# Altium PCB core-board.PcbDoc
Units mil, origin at the board's own origin, x right, y up, seen from the top; angles counter-clockwise.
Board outline 3375.03 x 1970.03 mil, 2 copper layers (Top Layer, Bottom Layer); 81 components, 71 nets, 298 pads, 191 vias.
Unrouted connection lines stored in the file: 3.
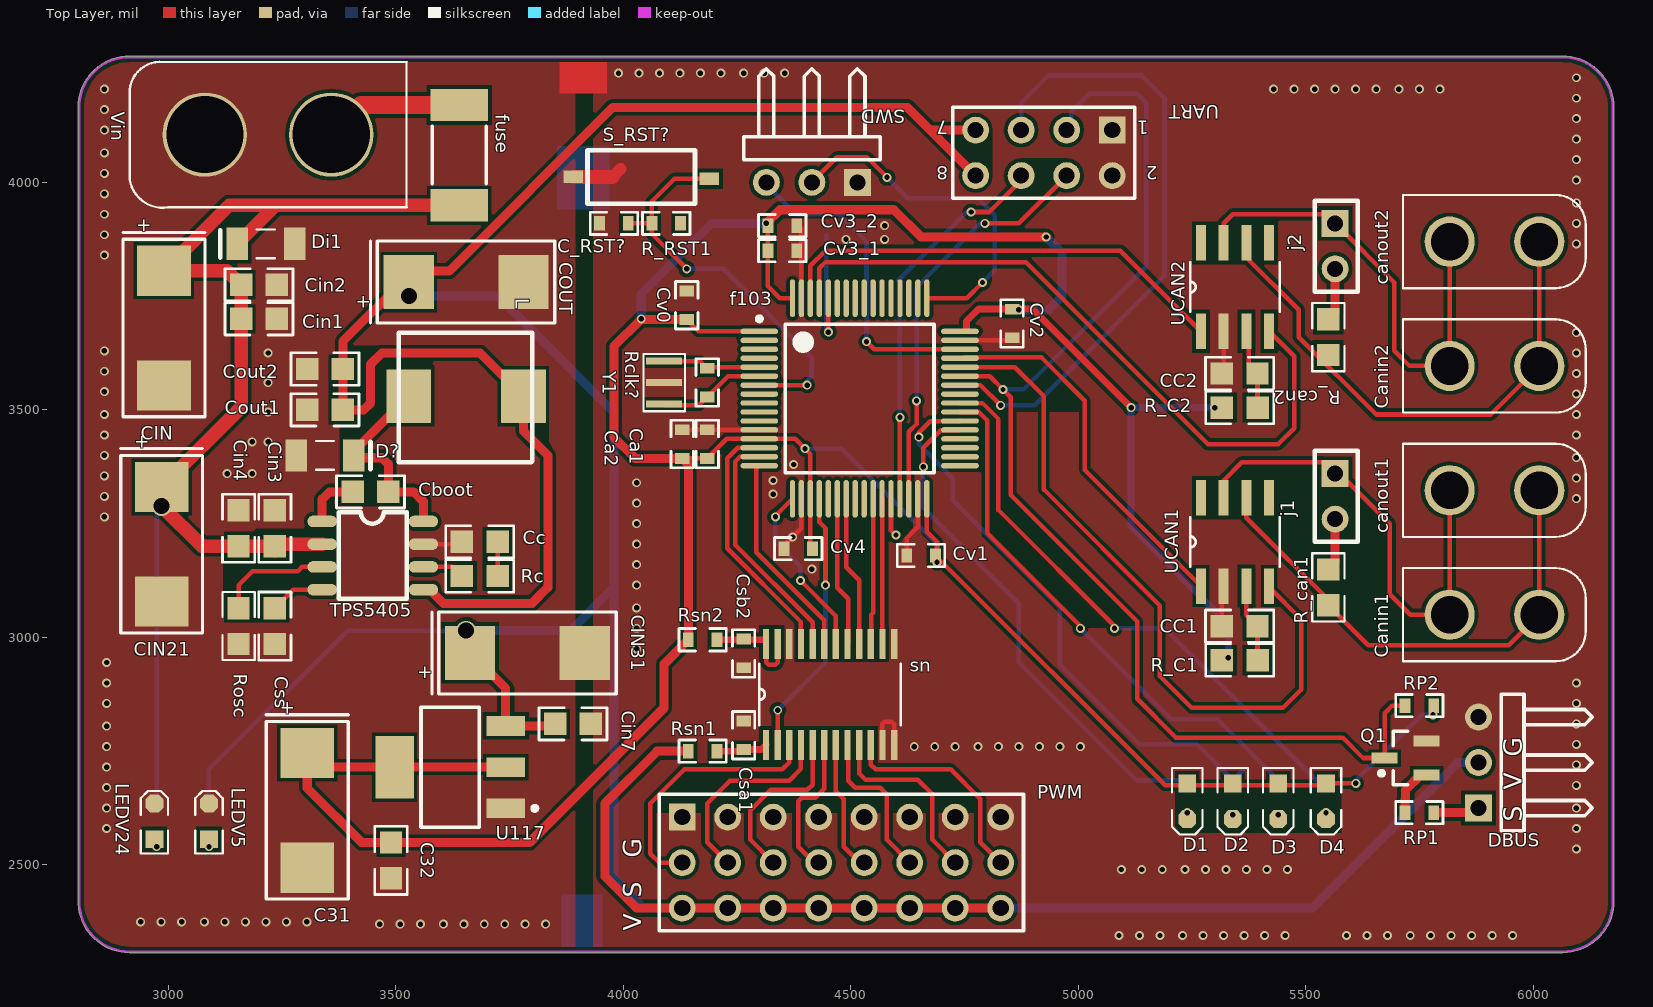
[diagram p0: Top Layer view]
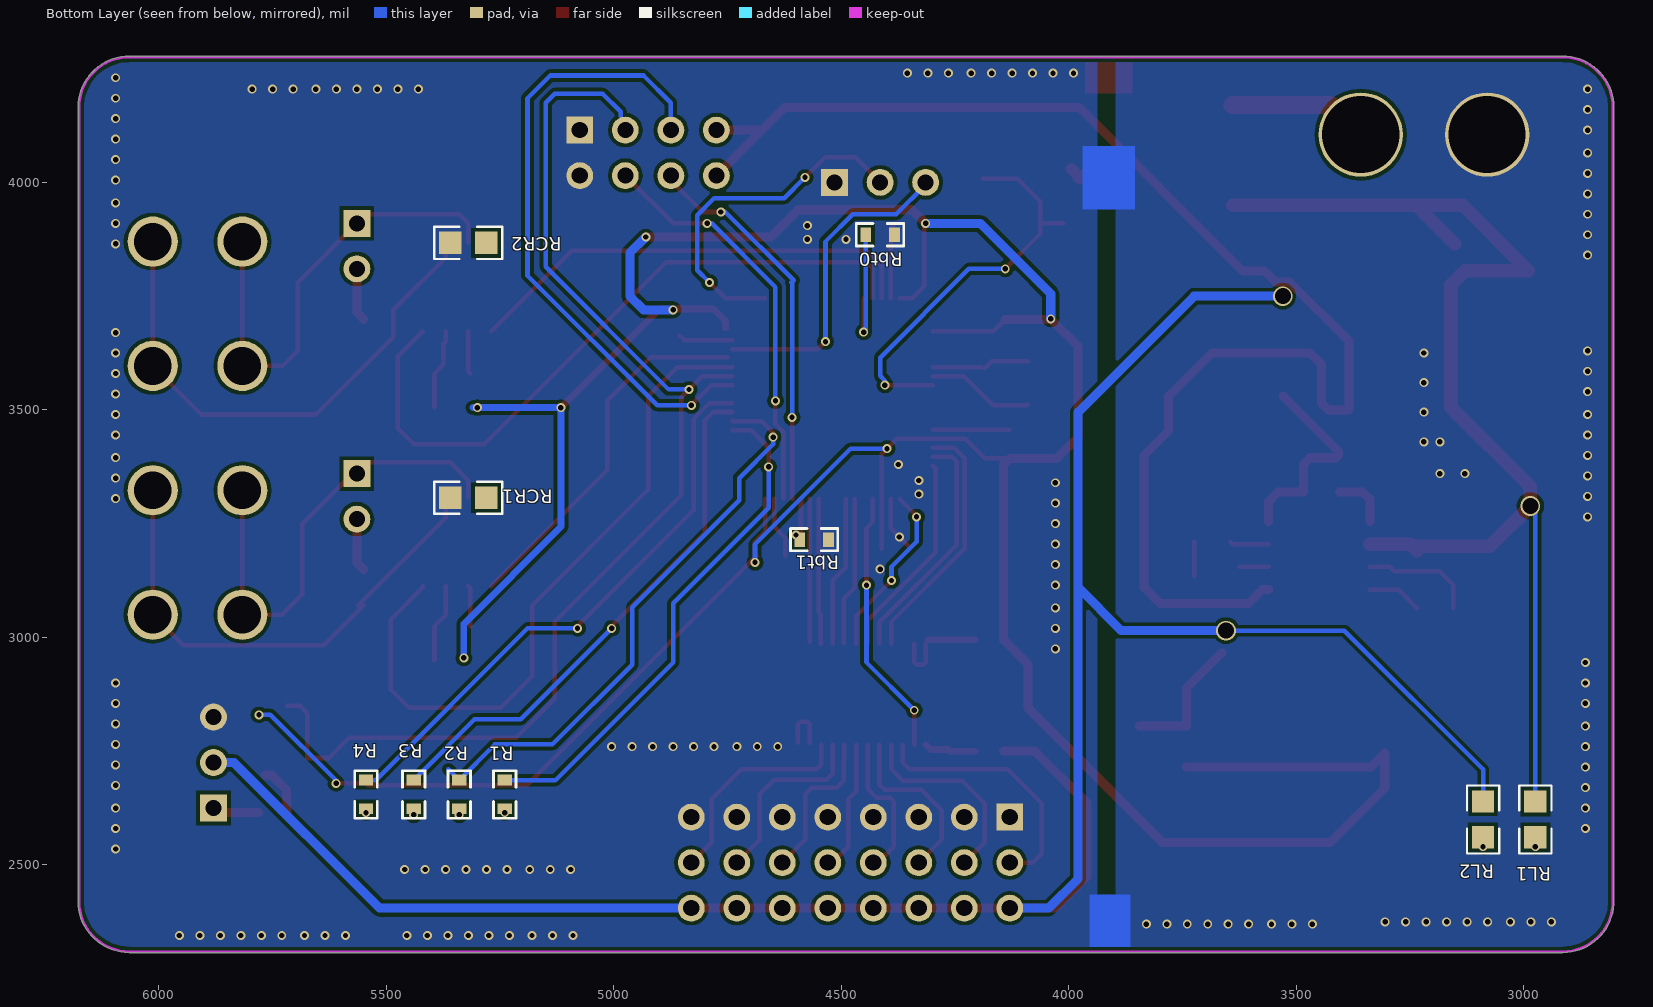
[diagram p1: Bottom Layer view, seen from below]
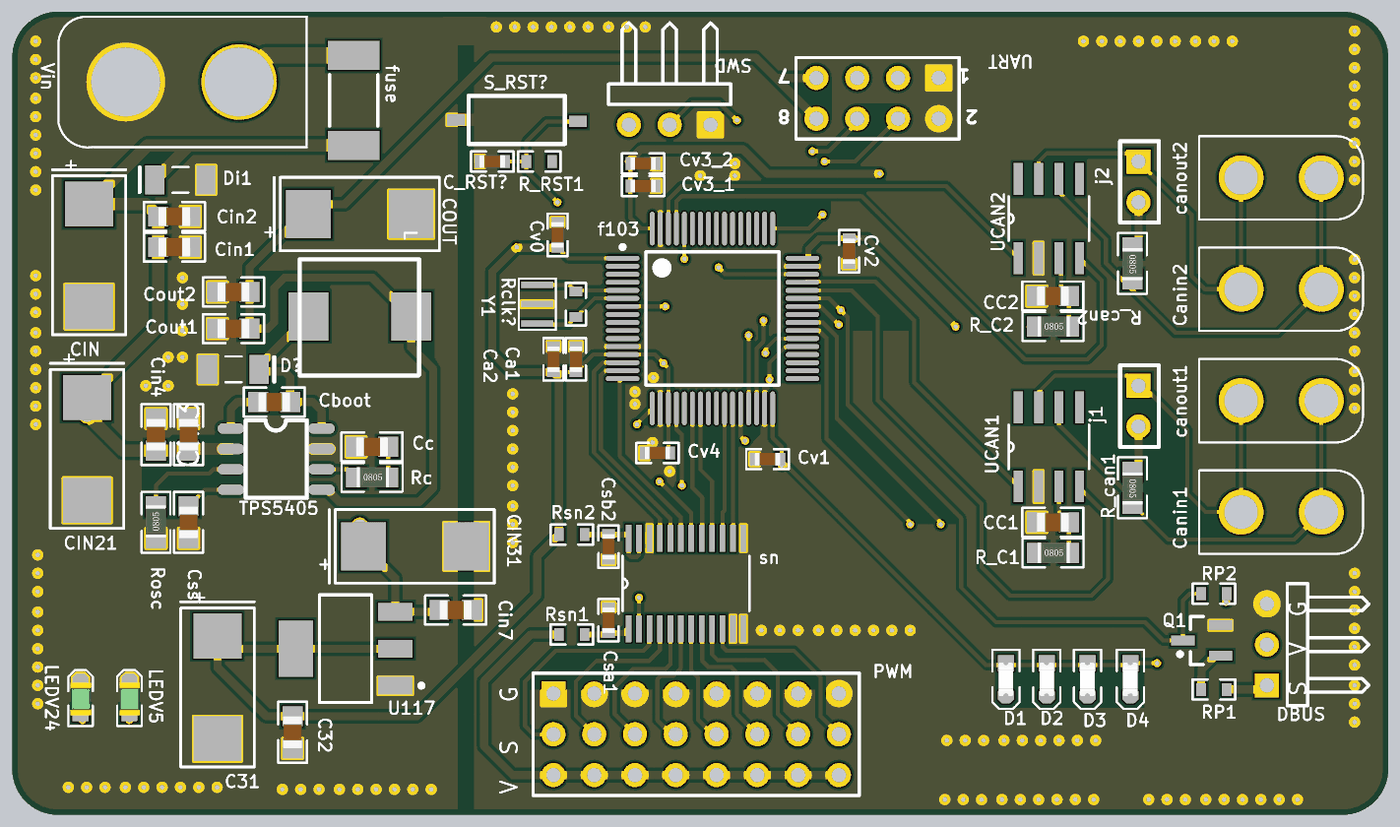
[diagram p2: 3D render of the assembled board from above, using the file's embedded part models]

## Layer stack, top to bottom
Top Solder: solder mask 0.4, Solder Resist, Dk 3.5
Top Layer: signal copper 1.4
Dielectric 1: dielectric 12.6, FR-4, Dk 4.8
Bottom Layer: signal copper 1.4
Bottom Solder: solder mask 0.4, Solder Resist, Dk 3.5

## Board outline
2802.64,2414.14 cw(c2805,2415) 2802.49,2415 2802.49,4165 2802.48,4165 cw(c2915,4165) 2915,4277.52 6065,4277.52 cw(c6065,4165) 6177.52,4165 cw(c6175,4165) 6177.3,4163.98 6177.3,2421.02 cw(c6175,2420) 6177.52,2420 cw(c6065,2420) 6065,2307.49 2915,2307.49 2915,2307.48 ccw(c2915,2310) 2915.02,2307.49 2915,2307.48 cw(c2915,2420)

## Design rules (kind name [scope] priority, off if disabled: settings)
Clearance [All] p1: gap=7 except(8: Arc-Poly Track-Poly SMDPad-Poly THPad-Poly Via-Poly Fill-Poly Poly-Poly)
PlaneConnect [All] p1: planeconnectstyle=Direct reliefexpansion=20 reliefentries=4 reliefconductorwidth=10 reliefairgap=10
PolygonConnect [All] p1: connectstyle=Direct reliefconductorwidth=10 reliefentries=4 polygonreliefangle="90 Angle" airgapwidth=10
RoutingVias [All] p1: holewidth=28 width=50 viastyle="Through Hole" minholewidth=28 minwidth=50 maxholewidth=28 maxwidth=50
SolderMaskExpansion [All] p1: expansion=4
Width [All] p1: maxlimit=50 minlimit=10 preferedwidth=10
29 further rules are at their usual default settings.

## Components (designator, comment, footprint, x,y, rotation, side; value= is the part's Value field where it differs from the comment)
C31 "100u" "CAP _TAN_E_7343" 3305,2625 r270 top
C32 "0.1u" C0805 3490,2510 r270 top
C_RST? "0.1u" C0603 3980,3910 r0 top
Ca1 "1u" C0603 4185,3425 r270 top
Ca2 "0.01u" C0603 4130,3425 r270 top
Canin1 "XT_30-2p" XT_30-2P 5915,3050 r180 top
Canin2 "XT_30-2p" XT_30-2P 5915,3596.67 r180 top
canout1 "XT_30-2p" XT_30-2P 5915,3323.33 r180 top
canout2 "XT_30-2p" XT_30-2P 5915,3870 r180 top
Cboot "0.1u" C0805 3445,3320 r180 top
Cc "2.2n" C0805 3685,3210 r0 top
CC1 "0.1u" C0805 5355,3025 r0 top
CC2 "0.1u" C0805 5355,3580 r0 top
CIN "100u" "CAP _TAN_E_7343" 2990,3685 r270 top
Cin1 "22u" C0805 3200,3700 r180 top
Cin2 "0.1u" C0805 3200,3775 r180 top
Cin3 "10u" C0805 3235,3240 r270 top
Cin4 "0.1u" C0805 3155,3240 r270 top
Cin7 "0.1u" C0805 3890,2810 r0 top
CIN21 "100u" "CAP _TAN_E_7343" 2985,3210 r270 top
CIN31 "100u" "CAP _TAN_E_7343" 3785,2965 r0 top
COUT "100u" "CAP _TAN_E_7343" 3650,3780 r0 top
Cout1 "22u" C0805 3345,3500 r180 top
Cout2 "0.1u" C0805 3345,3590 r180 top
Csa1 "0.1u" C0603 4265,2785 r270 top
Csb2 "0.1u" C0603 4265,2965 r270 top
Css "10n" C0805 3235,3025 r90 top
Cv0 "0.1u" C0603 4140,3730 r270 top
Cv1 "0.1u" C0603 4655,3180 r0 top
Cv2 "0.1u" C0603 4855,3690 r90 top
Cv3_1 "4.7u" C0603 4350,3850 r180 top
Cv3_2 "0.1u" C0603 4350,3905 r180 top
Cv4 "0.1u" C0603 4385,3195 r0 top
D1 "LED_0603" LED_0603 5240,2640 r90 top
D2 "LED_0603" LED_0603 5340,2640 r90 top
D3 "LED_0603" LED_0603 5440,2640 r90 top
D4 "LED_0603" LED_0603 5545,2640 r90 top
D? "Diode" 1206 3345,3400 r0 top
DBUS "KF2510-3P" KF2510-3P 5880,2625 r90 top
Di1 "Diode" 1206 3215,3865 r180 top
f103 "STM32F103RBT6" LQFP64_M 4520,3525 r0 top
fuse "FUSE" 2512 3640,4060 r270 top
j1 "Jumper1" jumper 5565,3310 r90 top
j2 "Jumper2" jumper 5565,3860 r90 top
L "330" inductor330 3655,3530 r0 top
LEDV5 "LED_0805" LED_0805 3090,2595.51 r90 top
LEDV24 "LED_0805" LED_0805 2970,2595.51 r90 top
PWM "Header 3×8" HDR3X8 4130,2605 r0 top
Q1 "PMBT3904" SOT23 5720,2735 r90 top
R1 "3.3k" R0603 5240,2655 r270 bottom
R2 "3.3k" R0603 5340,2655 r270 bottom
R3 "3.3k" R0603 5440,2655 r270 bottom
R4 "3.3k" R0603 5545,2655 r270 bottom
R_C1 "0" R0805 5355.45,2950 r0 top
R_C2 "0" R0805 5355.45,3505 r0 top
R_can1 "120" R0805 5550,3110 r270 top
R_can2 "120" R0805 5550,3660 r270 top
R_RST1 "10k" R0603 4095,3910 r0 top
Rbt0 "10k" R0603 4415,3885 r180 bottom
Rbt1 "10k" R0603 4560,3215 r0 bottom
Rc "47k" R0805 3685,3135 r0 top
Rclk? "1M" R0603 4185,3560 r90 top
RCR1 "10K" R0805 5320,3307 r180 bottom
RCR2 "10K" R0805 5320,3867 r180 bottom
RL1 "10k" R0805 2975,2600 r270 bottom
RL2 "1k" R0805 3090,2600 r270 bottom
Rosc "100k" R0805 3155,3025 r90 top
RP1 "4.7k" R0603 5750,2615 r180 top
RP2 "4.7k" R0603 5750,2850 r0 top
Rsn1 "0" R0603 4175,2750 r0 top
Rsn2 "0" R0603 4175,2995 r0 top
S_RST? "reset" SW 4040,4010 r180 top
sn "SN74LVC4245A_PW_" SN74LVC4245A_PW_ 4455,2875 r90 top
SWD "KF2510-3P" KF2510-3P 4515,4000 r180 top
TPS5405 "TPS5403DR" D0008A_M 3450,3180 r0 top
U117 "SPX1117" SPX1117 3620,2715 r90 top
UART "Header 4X2" HDR2X4 5075,4115 r180 top
UCAN1 "VP230" VP230 5345,3210 r90 top
UCAN2 "VP230" VP230 5345,3770 r90 top
Vin "XT_60-2p" XT_60-2P 3220,4105 r0 top
Y1 "XTAL" SMD-3P 4090,3560 r270 top

## Footprints (in the part's own frame and the unit in brackets; to place one, negate y for a bottom-side part, rotate by r counter-clockwise, add the part's x,y. Pads: shape width x height; smd on the part's side, far side on the other; paste and mask are expansions set on the pad)
1206 [mm]
  rect 1.2x1.8 smd: 1(-1.6,0) 2(1.6,0)
  silkscreen extent -0.51,-0.8 2.54,0.8
2512 [mm]
  rect 1.8x3.2 smd: 1(-2.8,0) 2(2.8,0)
  silkscreen extent -1.6,-1.5 1.6,1.5
C0603 [mm]
  rect 0.6x0.8 smd: 1(-0.8,0) 2(0.8,0)
  silkscreen extent -1.33,-0.63 1.33,0.63, body extent -0.8,-0.4 0.8,0.4, height 0.6
C0805 [mm]
  rect 1.25x1.25 smd: 1(-1,0) 2(1,0)
  silkscreen extent -1.9,-0.9 1.9,0.9, body extent -1,-0.6 1,0.6, height 1.2
"CAP _TAN_E_7343" [mm]
  rect 2.8x3 smd: 1(-3.073,0.025) 2(3.327,0.025)
  silkscreen extent -5.21,-2.26 5.08,2.31
D0008A_M [mm]
  oval 1.65x0.65 smd paste+0 mask+0.051: 1(-2.825,1.905) 2(-2.825,0.635) 3(-2.825,-0.635) 4(-2.825,-1.905) 5(2.825,-1.905) 6(2.825,-0.635) 7(2.825,0.635) 8(2.825,1.905)
  silkscreen extent -1.91,-2.41 1.91,2.41
HDR2X4 [mm] "Connector; Header; 4x2 Position"
  rect 1.5x1.5 hole 0.9: 1(0,0)
  round 1.5 hole 0.9: 2(0,2.54) 3(2.54,0) 4(2.54,2.54) 5(5.08,0) 6(5.08,2.54) 7(7.62,0) 8(7.62,2.54)
  silkscreen extent -1.27,-1.27 8.89,3.81
HDR3X8 [mm] "Connector; Header; 8 Position"
  rect 1.5x1.5 hole 0.9: 1(0,0)
  round 1.5 hole 0.9: 2(2.54,0) 3(5.08,0) 4(7.62,0) 5(10.16,0) 6(12.7,0) 7(15.24,0) 8(17.78,0) 9(0,-2.54) 10(2.54,-2.54) 11(5.08,-2.54) 12(7.62,-2.54) 13(10.16,-2.54) 14(12.7,-2.54) 15(15.24,-2.54) 16(17.78,-2.54) 17(0,-5.08) 18(2.54,-5.08) 19(5.08,-5.08) 20(7.62,-5.08) 21(10.16,-5.08) 22(12.7,-5.08) 23(15.24,-5.08) 24(17.78,-5.08)
  silkscreen extent -1.27,-6.35 19.05,1.27
inductor330 [mm]
  rect 2.5x3 smd: 1(-3.2,0) 2(3.2,0)
  silkscreen extent -3.75,-3.68 3.69,3.56
jumper [mm]
  rect 1.5x1.5 hole 0.9: 1(1.27,0)
  round 1.5 hole 0.9: 2(-1.27,0)
  silkscreen extent -2.54,-1.27 2.54,1.14
KF2510-3P [mm]
  rect 1.5x1.5 hole 0.9: 1(0,0)
  round 1.5 hole 0.9: 2(2.54,0) 3(5.08,0)
  silkscreen extent -1.27,-6.35 6.35,-1.27
LED_0603 [mm]
  rect 1x1 smd: 1(1,0)
  oct 1x1 smd: 2(-1,0)
  silkscreen extent -1.85,-0.85 1.85,0.85, body extent -1.03,-0.45 1.03,0.46, height 0.85
LED_0805 [mm]
  rect 1x1 smd: 1(-0.991,0)
  oct 1x1 smd: 2(1,0)
  silkscreen extent -1.79,-0.76 1.7,0.76, body extent -1.12,-0.65 0.91,0.62, height 1.1
LQFP64_M [mm]
  oval 2.1x0.3 smd: 1(-5.6,3.75) 2(-5.6,3.25) 3(-5.6,2.75) 4(-5.6,2.25) 5(-5.6,1.75) 6(-5.6,1.25) 7(-5.6,0.75) 8(-5.6,0.25) 9(-5.6,-0.25) 10(-5.6,-0.75) 11(-5.6,-1.25) 12(-5.6,-1.75) 13(-5.6,-2.25) 14(-5.6,-2.75) 15(-5.6,-3.25) 16(-5.6,-3.75) 33(5.6,-3.75) 34(5.6,-3.25) 35(5.6,-2.75) 36(5.6,-2.25) 37(5.6,-1.75) 38(5.6,-1.25) 39(5.6,-0.75) 40(5.6,-0.25) 41(5.6,0.25) 42(5.6,0.75) 43(5.6,1.25) 44(5.6,1.75) 45(5.6,2.25) 46(5.6,2.75) 47(5.6,3.25) 48(5.6,3.75)
  oval 0.3x2.1 smd: 17(-3.75,-5.6) 18(-3.25,-5.6) 19(-2.75,-5.6) 20(-2.25,-5.6) 21(-1.75,-5.6) 22(-1.25,-5.6) 23(-0.75,-5.6) 24(-0.25,-5.6) 25(0.25,-5.6) 26(0.75,-5.6) 27(1.25,-5.6) 28(1.75,-5.6) 29(2.25,-5.6) 30(2.75,-5.6) 31(3.25,-5.6) 32(3.75,-5.6) 49(3.75,5.6) 50(3.25,5.6) 51(2.75,5.6) 52(2.25,5.6) 53(1.75,5.6) 54(1.25,5.6) 55(0.75,5.6) 56(0.25,5.6) 57(-0.25,5.6) 58(-0.75,5.6) 59(-1.25,5.6) 60(-1.75,5.6) 61(-2.25,5.6) 62(-2.75,5.6) 63(-3.25,5.6) 64(-3.75,5.6)
  silkscreen extent -5.72,-4.15 4.15,4.57
R0603 [mm]
  rect 0.6x0.8 smd: 1(-0.8,0) 2(0.8,0)
  silkscreen extent -1.33,-0.63 1.33,0.63
R0805 [mm]
  rect 1.25x1.25 smd: 1(-1,0) 2(1,0)
  silkscreen extent -1.9,-0.9 1.9,0.9, body extent -0.95,-0.63 1.05,0.63, height 0.55
SMD-3P [mm]
  rect 0.4x2 smd: 1(-1.2,0) 2(0,0) 3(1.2,0)
  silkscreen extent -1.6,-1.14 1.6,1.17
SN74LVC4245A_PW_ [mil]
  rect 66x14 smd: 1(-111,140.75) 2(-111,115.16) 3(-111,89.57) 4(-111,63.98) 5(-111,38.39) 6(-111,12.8) 7(-111,-12.8) 8(-111,-38.39) 9(-111,-63.98) 10(-111,-89.57) 11(-111,-115.16) 12(-111,-140.75) 13(111,-140.75) 14(111,-115.16) 15(111,-89.57) 16(111,-63.98) 17(111,-38.39) 18(111,-12.8) 19(111,12.8) 20(111,38.39) 21(111,63.98) 22(111,89.57) 23(111,115.16) 24(111,140.75)
  silkscreen extent -67,-156 67,156
SOT23 [mm]
  rect 0.6x1.45 smd: 1(-0.95,-1.175) 2(0.95,-1.175) 3(0,1.175)
  silkscreen extent -1.5,-0.1 1.5,1.47
SPX1117 [mm]
  rect 1.1x2.15 smd: 1(-2.3,-3.1) 2(0,-3.1) 3(2.3,-3.1)
  rect 3.5x2.15 smd: 2(0,3.1)
  silkscreen extent -3.35,-4.85 3.35,1.62
SW [mm]
  rect 1.1x0.7 smd: 1(-3.8,0.05) 2(3.8,-0.05)
  silkscreen extent -3,-1.55 3,1.45
VP230 [mil]
  rect 78x22 smd: 1(-97,75) 2(-97,25) 3(-97,-25) 4(-97,-75) 5(97,-75) 6(97,-25) 7(97,25) 8(97,75)
  silkscreen extent -54,-98 54,98
XT_30-2P [mm] "电池端子小"
  round 2.8 hole 2.1: 1(-2.5,0) 2(2.5,0)
  silkscreen extent -5.1,-2.6 5.1,2.6
XT_60-2P [mm] "电池端子大"
  round 4.7 hole 4.3: 1(-3.535,0) 2(3.525,0)
  silkscreen extent -7.73,-4.08 7.75,4.07

## Part data
C31 CIN CIN21 CIN31 COUT: library part "CAP _TAN_E_7343"
C32 Cboot Cc CC1 CC2 Cin1 Cin2 Cin3 Cin4 Cin7 Cout1 Cout2 Css: library part CAP_0805
C_RST? Ca1 Ca2 Csa1 Csb2 Cv0 Cv1 Cv2 Cv3_1 Cv3_2 Cv4: library part CAP_0603
fuse: library part Fuse
j1 j2: library part Jumper
L: library part LQH3NPN100
Q1: "NPN Switching Transistor"
R1 R2 R3 R4 R_RST1 Rbt0 Rbt1 Rclk? RP1 RP2 Rsn1 Rsn2: library part RES_0603
R_C1 R_C2 R_can1 R_can2 Rc RCR1 RCR2 RL1 RL2 Rosc: library part RES_0805
S_RST?: library part SW-PB, "Switch"
TPS5405: "Imported"
UART: "Header, 4-Pin, Dual row"
Y1: library part XTAL_C_MINI

## Via types
v1: diameter 19.68, hole 11.81, Top Layer to Bottom Layer, 188 vias
v2: diameter 43.31, hole 35.43, Top Layer to Bottom Layer, 3 vias

## Nets (pads, with @x,y where several pads share a name; then routed paths per layer and width w, separated by ;. In a path a pad name is that pad's centre, name@x,y a point inside that pad or via, vN(x,y) a via of type N, cw(c..) or ccw(c..) an arc to the next point about the centre after c; other vN are vias at no path point)
CAN_H1: Canin1.2 canout1.2 j1.1 UCAN1.7 | length 1095.9
  Top Layer w10: UCAN1.7 5320,3345 5360,3385 5540,3385 j1.1 ; j1.1@5575,3360 5685,3250 5685,3240 5685,3095 5730,3050 Canin1.2 5816.57,3108.43 canout1.2 canout1.2@5779.91,3360
CAN_H2: Canin2.2 canout2.2 j2.1 UCAN2.7 | length 1047.1
  Top Layer w10: UCAN2.7 5320,3910 5340,3930 5545,3930 j2.1 5695,3780 5695,3630 5728.33,3596.67 Canin2.2 canout2.2
CAN_L1: Canin1.1 canout1.1 R_can1.2 UCAN1.6 | length 1135.5
  Top Layer w10: UCAN1.6 5370,3263.19 R_can1.2@5562.56,3070.63 ; R_can1.2 5637.75,2982.88 5946.31,2982.88 Canin1.1 canout1.1 canout1.1@5994.99,3323.33
CAN_L2: Canin2.1 canout2.1 R_can2.2 UCAN2.6 | length 1171
  Top Layer w10: UCAN2.6 5370,3835 5485,3720 5485,3660 5655,3490 5906.76,3490 Canin2.1 canout2.1
CAN_RX1: f103.44 UCAN1.4 | length 1544.2
  Top Layer w10: f103.44 4861.1,3593.9 4925,3530 4925,3325 5180,3070 5180,2915 5250,2845 5450,2845 5490,2885 5490,3040 5420,3110 UCAN1.4
CAN_RX2: f103.61 UCAN2.4 | length 1531.1
  Top Layer w10: f103.61 4431.42,3811.42 4445,3825 4885,3825 5285,3425 5440,3425 5475,3460 5475,3618 UCAN2.4
CAN_TX1: f103.45 UCAN1.1 | length 817.1
  Top Layer w10: f103.45@4750,3615.36 4919.64,3615.36 5015,3520 5015,3368 UCAN1.1
CAN_TX2: f103.62 UCAN2.1 | length 1016.6
  Top Layer w10: f103.62 4411.73,3816.73 4445,3850 5093,3850 UCAN2.1
DIR: f103.20 sn.2 | length 589.7
  Top Layer w10: sn.2 4339.84,2839.84 v1(4340,2840) ; f103.20 4431.42,3253.67 4445,3240.09 v1(4445,3115)
  Bottom Layer w10: v1(4340,2840) 4445,2945 v1(4445,3115)
GND: C31.2 C32.2 C_RST?.1 Ca1.1 Ca2.1 CC1.1 CC2.1 Cc.1 Cin1.1 Cin2.1 Cin3.1 Cin4.1 Cin7.2 CIN21.2 CIN31.2 CIN.2 Cout1.2 Cout2.2 COUT.2 Csa1.1 Csb2.2 Css.1 Cv0.1 Cv1.1 Cv2.1 Cv3_1.1 Cv3_2.1 Cv4.1 D?.1 DBUS.3 Di1.1 f103.12 f103.18 f103.31 f103.47 f103.63 LEDV5.2 LEDV24.2 PWM.1 PWM.2 PWM.3 PWM.4 PWM.5 PWM.6 PWM.7 PWM.8 Q1.2 Rbt0.2 Rbt1.1 RCR1.1 RCR2.1 Rosc.1 S_RST?.2 sn.11 sn.12 sn.13 sn.22 SWD.1 TPS5405.7 U117.1 UART.1 UART.2 UCAN1.2 UCAN2.2 Vin.1 Y1.2 | length 1205.9
  Top Layer w10: TPS5405.7 3640.63,3205 Cc.1 ; Ca2.1 4130.39,3456.1 f103.12 ; Cv4.1@4353.5,3201.46 4392.05,3240 f103.18 ; Cv3_2.1@4381.5,3910 4392.05,3899.45 f103.63 ; sn.11@4570.16,2769 4570,2769.16 4570,2810 4575,2815 4590,2815 4595.75,2809.25 sn.12@4595.75,2769 ; Cv1.1 4623.5,3218.5 4647.95,3242.95 f103.31 ; f103.47 4844.45,3652.95 Cv2.1@4855,3663.5 ; CC1.1 5315.63,3108.63 UCAN1.2 ; CC2.1 5320,3584.37 UCAN2.2
  Top Layer w25: 3976.97,4011.97 3995,4030
  Top Layer w30: S_RST?.2 3976.97,4011.97
  other v1: 5090,2345 5135,2345 5180,2345 5230,2345 5275,2345 5320,2345 5365,2345 5410,2345 5455,2345 5590,2345 5635,2345 5680,2345 5730,2345 5775,2345 5820,2345 5865,2345 5910,2345 5955,2345 3465,2370 3510,2370 3555,2370 3605,2370 3650,2370 3695,2370 3740,2370 3785,2370 3830,2370 2940,2375 2985,2375 3030,2375 3080,2375 3125,2375 3170,2375 3215,2375 3260,2375 3305,2375 5095,2490 5140,2490 5185,2490 5235,2490 5280,2490 5325,2490 5370,2490 5415,2490 5460,2490 6095,2535 2865,2580 6095,2580 2865,2625 6095,2625 2865,2670 6095,2675 2865,2715 6095,2720 2865,2760 4640,2760 4685,2760 4730,2760 4780,2760 4825,2760 4870,2760 4915,2760 4960,2760 5005,2760 6095,2765 2865,2805 6095,2810 2865,2855 6095,2855 2865,2900 6095,2900 2865,2945 4030,2975 4030,3020 4030,3065 4030,3115 4415,3150 4030,3160 4030,3205 4372.78,3220.73 4030,3250 2860,3265 4030,3295 6095,3305 2860,3310 4330,3315 4030,3340 4330,3345 6095,3350 2860,3355 3130,3360 3185,3360 4375,3380 6095,3395 2860,3400 3185,3430 3220,3430 2860,3445 6095,3445 2860,3490 6095,3490 3220,3495 6095,3535 2860,3540 3220,3560 6095,3580 2860,3585 3220,3625 6095,3625 2860,3630 6095,3670 2860,3840 6095,3865 4490,3875 4575,3875 2860,3885 4575,3905 6095,3910 2860,3930 6095,3955 2860,3975 6095,4005 2860,4020 6095,4050 2860,4065 6095,4095 2860,4115 6095,4140 2860,4160 6095,4185 2860,4205 5430,4205 5475,4205 5520,4205 5565,4205 5610,4205 5655,4205 5705,4205 5750,4205 5795,4205 6095,4230 3990,4240 4035,4240 4080,4240 4125,4240 4170,4240 4215,4240 4265,4240 4310,4240 4355,4240
KEY_1: f103.51
KEY_2: f103.52
KEY_3: f103.53
KEY_4: f103.54
LED_1: f103.37 R1.1 | length 1132.6
  Top Layer w10: v1(4660,3375) 4660,3416.7 4698.3,3455 4739.37,3455 f103.37
  Bottom Layer w10: v1(4660,3375) 4660,3285 4870,3075 4870,2945 5128.5,2686.5 R1.1
LED_2: f103.38 R2.1 | length 1258.2
  Top Layer w10: v1(4650,3440) 4650,3450 4675,3475 4739.69,3475 f103.38
  Bottom Layer w10: v1(4650,3440) 4650,3425 4725,3350 4725,3301.5 4960,3066.5 4960,2940 5135,2765 5261.5,2765 R2.1 5363.81,2710.31
LED_3: f103.39 R3.1 | length 1180.8
  Top Layer w10: f103.39 4781.54,3495.47 4800,3477.02 4800,3230 v1@5007.5,3022.5
  Bottom Layer w10: v1(5005,3020) 5205,2820 5306.5,2820 R3.1
LED_4: f103.40 R4.1 | length 1266.4
  Top Layer w10: f103.40 4789.84,3515.16 4825,3480 4825,3280 v1@5082.5,3022.5
  Bottom Layer w10: v1(5080,3020) 5190,3020 5523.5,2686.5 R4.1
NetC_RST?_2: C_RST?.2 f103.7 R_RST1.1 S_RST?.1 | length 904.4
  Top Layer w10: C_RST?.2 R_RST1.1 ; v1(4140,3810) 4063.5,3886.5 R_RST1.1 ; S_RST?.1 4113.03,4008.03 4063.5,3958.5 R_RST1.1 ; f103.7 v1(4404.53,3554.53)
  Bottom Layer w10: v1(4140,3810) 4220,3810 4415,3615 4415,3575 4404.53,3564.53 v1(4404.53,3554.53)
NetCboot_1: Cboot.1 D?.2 L.1 TPS5405.8 | length 454.6
  Top Layer w20: L.1 3407.99,3408.98 D?.2 3412.99,3395 3470,3395 3484.37,3380.63 Cboot.1 3540,3320 3561.22,3298.78 TPS5405.8
NetCboot_2: Cboot.2 TPS5405.1 | length 122.3
  Top Layer w20: TPS5405.1 3338.78,3303.78 3355,3320 Cboot.2
NetCC1_2: CC1.2 R_C1.2 UCAN1.3 | length 173.3
  Top Layer w10: UCAN1.3 5370,3049.37 CC1.2 5394.37,2950.45 R_C1.2
NetCC2_2: CC2.2 R_C2.2 UCAN2.3 | length 177.6
  Top Layer w10: UCAN2.3 5370,3650 5375,3645 5375,3599.37 CC2.2 R_C2.2@5394.37,3505.45
NetCc_2: Cc.2 Rc.2 | length 75
  Top Layer w10: Rc.2 Cc.2
NetCsa1_2: Csa1.2 Rsn1.2 sn.1 | length 113.6
  Top Layer w15: Rsn1.2 4261.5,2750 Csa1.2 4303.76,2753.5 sn.1
NetCsb2_1: Csb2.1 Rsn2.2 sn.23 sn.24 | length 215
  Top Layer w10: sn.24 4314.25,2945.75 4320,2940 4335,2940 4340,2945 4340,2985.84 sn.23
  Top Layer w15: Rsn2.2 sn.24@4310,2995
NetCss_2: Css.2 TPS5405.4 | length 120.6
  Top Layer w10: Css.2 3275.63,3105 TPS5405.4
NetD1_2: D1.2 R1.2
  other v1: 5240,2615
NetD2_2: D2.2 R2.2
  other v1: 5340,2610
NetD3_2: D3.2 R3.2
  other v1: 5440,2610
NetD4_2: D4.2 R4.2
  other v1: 5545,2615
NetDBUS_1: DBUS.1 RP1.1 | length 102.6
  Top Layer w20: RP1.1 5870,2615 DBUS.1
Netf103_5: f103.5 Rclk?.2 Y1.1 | length 208.6
  Top Layer w10: Y1.1 4169.25,3607.24 Rclk?.2 ; Rclk?.2@4192.4,3593.9 f103.5
Netf103_6: f103.6 Rclk?.1 Y1.3 | length 237.3
  Top Layer w10: Y1.3 4092.76,3510 4166.5,3510 Rclk?.1 4230.71,3574.21 f103.6
Netf103_28: f103.28 Rbt1.2 | length 84.8
  Top Layer w10: f103.28 4588.9,3235 4598.9,3225 v1(4600,3225)
Netf103_60: f103.60 Rbt0.1 | length 290.2
  Top Layer w10: v1(4451.1,3671.1) f103.60
  Bottom Layer w10: Rbt0.1 4446.5,3675.71 v1(4451.1,3671.1)
Netfuse_1: fuse.1 Vin.2 | length 308.2
  Top Layer w40: Vin.2 3424.02,4170.24 fuse.1
Netj1_2: j1.2 R_can1.1 | length 116.8
  Top Layer w20: R_can1.1 5565,3164.37 j1.2
Netj2_2: j2.2 R_can2.1 | length 116.8
  Top Layer w20: R_can2.1 5565,3714.37 j2.2
NetLEDV5_1: LEDV5.1 RL2.2
  other v1: 3090,2540
NetLEDV24_1: LEDV24.1 RL1.2
  other v1: 2975,2540
NetQ1_1: Q1.1 RP1.2 | length 110.4
  Top Layer w20: RP1.2 5718.5,2643.5 5720,2645 5720,2665 5752.6,2697.6 Q1.1
NetRc_1: Rc.1 TPS5405.6 | length 64.4
  Top Layer w10: TPS5405.6 Rc.1@3625.63,3155
NetRCR1_2: RCR1.2 UCAN1.8
NetRCR2_2: RCR2.2 UCAN2.8
NetRosc_2: Rosc.2 TPS5405.3 | length 251
  Top Layer w10: Rosc.2 3155,3115 3185,3145 3285,3145 3295,3155 TPS5405.3
PO1: PWM.9 sn.3 | length 569.7
  Top Layer w10: PWM.9 4080,2505 4060,2525 4060,2635 4135,2710 4349.84,2710 4365,2725.16 4365,2763.57 sn.3
PO2: PWM.10 sn.4 | length 439.1
  Top Layer w10: PWM.10 4185,2550 4185,2635 4235,2685 4365,2685 4391.02,2711.02 sn.4
PO3: PWM.11 sn.5 | length 383.2
  Top Layer w10: PWM.11 4280,2555 4280,2620 4325,2665 4405,2665 4416.61,2676.61 sn.5
PO4: PWM.12 sn.6 | length 324.8
  Top Layer w10: PWM.12 4420,2505 4385,2540 4385,2640 4393,2648 4423,2648 4442.2,2667.2 sn.6
PO5: PWM.13 sn.7 | length 290.6
  Top Layer w10: sn.7 4467.8,2662.2 4485,2645 4485,2540 4520,2505 PWM.13
PO6: PWM.14 sn.8 | length 347.8
  Top Layer w10: sn.8 4493.39,2731.61 4495,2730 4495,2685 4510,2670 4565,2670 4580,2655 4580,2555 PWM.14
PO7: PWM.15 sn.9 | length 414.2
  Top Layer w10: sn.9 4518.98,2701.02 4533,2687 4647,2687 4647.5,2687.5 4680,2655 4680,2555 PWM.15
PO8: PWM.16 sn.10 | length 473.9
  Top Layer w10: sn.10 4544.57,2720.43 4555,2710 4720,2710 4785,2645 4785,2550 PWM.16
"PWM 1": f103.14 sn.21 | length 554.9
  Top Layer w10: f103.14 4251.73,3416.73 4229.19,3394.19 4229.19,3195.81 4391.02,3033.98 sn.21
"PWM 2": f103.15 sn.20 | length 529.2
  Top Layer w10: f103.15 4257.05,3397.05 4246.19,3386.19 4246.19,3203.81 4416.61,3033.39 sn.20 sn.20@4417.2,2986
"PWM 3": f103.16 sn.19 | length 455.9
  Top Layer w10: f103.16 4293,3370.83 4293,3187 4442.2,3037.8 sn.19
"PWM 4": f103.17 sn.18 | length 388.4
  Top Layer w10: v1@4333.92,3266.08 f103.17 ; v1(4390,3125) 4467.8,3047.2 sn.18
  Bottom Layer w10: v1(4335,3265) 4335,3210 4390,3155 v1(4390,3125)
"PWM 5": f103.22 sn.17 | length 326.9
  Top Layer w10: f103.22 4470.79,3109.21 4495,3085 sn.17@4495,2987.61
"PWM 6": f103.23 sn.16 | length 330.3
  Top Layer w10: f103.23 4490.47,3154.53 4518.98,3126.02 sn.16
"PWM 7": f103.26 sn.15 | length 321.3
  Top Layer w10: sn.15@4544.06,2986.51 sn.15 4545,2986.43 4545,3050 4549.53,3054.53 f103.26
"PWM 8": f103.27 sn.14 | length 313.9
  Top Layer w10: f103.27 4570.16,3303.58 sn.14@4570.16,2991
RXD1: f103.43 Q1.3 RP2.1 UART.3 | length 2643.3
  Top Layer w10: f103.43 4805.79,3574.21 v1(4835,3545) 4851.84,3528.16 4851.84,3313.16 5130,3035 5130,2865 5215,2780 5581.31,2780 5626.31,2735 Q1.3 5673.74,2833.74 5690,2850 RP2.1
  Bottom Layer w10: v1(4835,3545) 4880,3545 5150,3815 5150,4175 5130,4195 5025,4195 4985,4155 4985,4145
RXD3: f103.30 UART.4 | length 904
  Top Layer w10: f103.30 4628.16,3304.64 4628.16,3452.2 4645,3469.04 v1(4645,3520) ; v1(4795,3910) 4870,3910 UART.4
  Bottom Layer w10: v1(4645,3520) 4645,3770 4785,3910 v1(4795,3910)
SWCLK: f103.49 SWD.2 | length 778.1
  Top Layer w10: SWD.2 4470,4055 4536.03,4055 v1(4580,4011.03) ; f103.49 4755.47,3745.47 v1(4790,3780)
  Bottom Layer w10: v1(4580,4011.03) 4626.03,3965 4780,3965 4816.84,3928.16 4816.84,3806.84 v1(4790,3780) v1@4785,3780
SWDIO: f103.46 SWD.3 | length 709.2
  Top Layer w10: v1(4535,3650) 4551.73,3633.27 f103.46
  Bottom Layer w10: SWD.3 4315,3995 4380,3930 4475,3930 4535,3870 v1(4535,3650)
TXD1: f103.42 UART.5 | length 1396.6
  Top Layer w10: f103.42 4785.47,3554.53 v1(4830,3510)
  Bottom Layer w10: v1(4830,3510) 4905,3510 5190,3795 5190,4185 5140,4235 4935,4235 4875,4175 UART.5
TXD3: f103.29 UART.6 | length 858.4
  Top Layer w10: f103.29 v1(4608.58,3483.58) ; v1(4765,3935) 4805,3935 4875,4005 UART.6
  Bottom Layer w10: v1@4610,3480 4608.58,3481.42 v1(4608.58,3483.58) 4608.58,3778.58 4610,3780 4605,3785 4755,3935 v1(4765,3935)
V_3.3: C31.1 C32.1 Ca1.2 Ca2.2 Cv0.2 Cv1.2 Cv2.2 Cv3_1.2 Cv3_2.2 Cv4.2 D1.1 D2.1 D3.1 D4.1 f103.1 f103.13 f103.19 f103.32 f103.48 f103.64 R_C1.1 R_C2.1 R_RST1.2 RP2.2 Rsn2.1 U117.2 | length 8044.1
  Top Layer w10: Ca2.2 Ca1.2 4227.91,3436.42 f103.13 4378.58,3436.42 v1(4400,3415) 4411.73,3403.27 f103.19 Cv4.2@4411.73,3194.76 ; Cv0.2 4165.87,3672.64 f103.1 ; Cv3_2.2@4318.5,3910 4318.5,3771.5 4344.53,3745.47 f103.64 ; f103.32 4667.64,3232.36 4690,3210 4690,3183.5 Cv1.2 5191.5,2675 5540.63,2675 D4.1 v1(5610.63,2679.37) ; Cv2.2@4850,3721.5 Cv2.2@4855,3726.5
  Top Layer w15: 4755,3680 4755,3695 4781.5,3721.5 4850,3721.5 Cv2.2 4900,3721.5 v1(5116.5,3505)
  Top Layer w20: U117.2@3742.05,2715 3497.95,2715 3336.98,2715 C31.1 3306,2669 3425.63,2549.37 C32.1 3794.37,2549.37 4090,2845 4090,2941.5 Rsn2.1 4143.5,3380 Ca2.2 4026.5,3393.5 3980,3440 3980,3640 4038.5,3698.5 Cv0.2 ; v1(4315,3910) 4345,3940 4595,3940 4655,3880 v1(4930,3880)
  Bottom Layer w10: v1(4400,3415) 4480,3415 4690,3205 v1(4690,3165) ; v1(5610.63,2679.37) 5610.63,2685.63 5755,2830 v1(5780,2830)
  Bottom Layer w15: 5310,3505 v1(5300,3505) v1(5116.5,3505) 5116.5,3243.5 5330,3030 v1(5330,2955)
  Bottom Layer w20: v1(4040,3700) 4040,3755 4195,3910 v1(4315,3910) ; v1(4870,3720) 4935,3720 4965,3750 4965,3845 v1(4930,3880)
VCC_5: Cin7.1 CIN31.1 Cout1.1 Cout2.1 COUT.1 DBUS.2 L.2 PWM.17 PWM.18 PWM.19 PWM.20 PWM.21 PWM.22 PWM.23 PWM.24 RL2.1 Rsn1.1 TPS5405.5 U117.3 UART.7 UART.8 | length 8850.5
  Top Layer w20: TPS5405.5 3575,3105 3605,3075 3800,3075 3835,3110 3835,3400 3780.98,3454.02 L.2 3685.98,3625 3470,3625 3445,3600 3445,3515 3430,3500 Cout1.1 Cout2.1 3384.37,3650.63 3514.74,3781 COUT.1 3546,3781 3570,3805 3617.7,3805 3977.7,4165 4625,4165 4675,4115 ; CIN31.1 3742.05,2887.97 U117.3 Cin7.1@3846.18,2805.55 ; Rsn1.1 4075,2750 3960,2635 3960,2475 4030,2405 PWM.17 PWM.18 PWM.19 PWM.20 PWM.21 PWM.22 PWM.23 PWM.24 ; UART.8 4675,4115 ; UART.7 4675,4115
  Bottom Layer w10: RL2.1 3090,2710 3395,3015 v2(3655,3015)
  Bottom Layer w20: v2(3530,3750) 3725,3750 3980,3495 3980,3110 ; v2(3655,3015) 3885,3015 3980,3110 ; PWM.17 4045,2405 3980,2470 3980,3110 ; PWM.24 5515,2405 5835,2725 DBUS.2
VCC_24V: Cin1.2 Cin2.2 Cin3.2 Cin4.2 CIN21.1 CIN.1 Di1.2 fuse.2 RL1.1 TPS5405.2 | length 2618.7
  Top Layer w30: Di1.2 3236.77,3949.76 ; Cin3.2@3235,3190.63 3249.37,3205 TPS5405.2 ; Cin3.2 Cin4.2 3074.37,3200.63 v2(2986,3289) CIN21.1 3160.63,3505.61 Cin1.2 Cin2.2 3129.65,3805.98 CIN.1 3134.78,3949.76 3236.77,3949.76 ; fuse.2 3236.77,3949.76
  Bottom Layer w10: RL1.1 2975,3278 v2(2986,3289)
pads on no net: f103.2 f103.3 f103.4 f103.8 f103.9 f103.10 f103.11 f103.21 f103.24 f103.25 f103.33 f103.34 f103.35 f103.36 f103.41 f103.50 f103.55 f103.56 f103.57 f103.58 f103.59 UCAN1.5 UCAN2.5

## Polygon pours and split planes (outlines as drawn)
GND on Top Layer "Top Layer-No Net" (solid, remove dead copper, pour order 2): 2805,4185 2810,4205 2840,4245 2860,4265 2870,4265 2900,4275 2915,4275 6065,4275 6100,4270 6115,4260 6125,4260 6145,4240 6160,4225 6165,4210 6170,4190 6174.79,4165 6174.79,2410.21 6170,2390 6170,2380 6160,2370 6160,2360 6120,2320 6115,2320 6100,2320 6065,2310 2890,2310 2880,2315 2870,2320 2840,2340 2820,2365 2810,2390 2805,2400 2805,2425
GND on Bottom Layer "Top Layer-No Net" (solid, remove dead copper, pour order 6): 2915,2310 2890,2310 2885,2315 2870,2315 2860,2325 2855,2325 2845,2335 2825,2355 2815,2365 2815,2380 2805,2390 2805,2405 2805,4175 2810,4195 2820,4215 2820,4225 2840,4245 2855,4260 2860,4260 2865,4260 2870,4265 2885,4270 2915,4275 6080,4275 6095,4275 6105,4270 6120,4265 6140,4245 6160,4225 6165.8,4215 6170,4195 6175,4185 6175,4170 6175,2410 6170,2385 6160,2365 6160,2360 6135,2335 6125,2325 6120,2325 6105,2315 6085,2310 6065,2310

## Keep-outs
Keep-Out Layer:
  lines w5: 2805,2415 2805,4165 cw(c2915,4165) 2915,4275 6065,4275 cw(c6065,4165) 6175,4165 ; 2805,2420 ccw(c2915,2420) 2915,2310 6065,2310 ccw(c6065,2420) 6175,2420 ; 6174.79,2420 6174.79,4165

## Other copper
Top Layer:
  rectangle net GND: 3860,4195 3965,4265
  pour cut-out: 3935,2315 3935,4275 3920,4275 3895,4275 3895,2320 3910,2320
  pour cut-out: 4065,2615 4785,2615 4785,2626.26 4756.26,2655 4085,2655
  pour cut-out: 5212.31,2661.75 5212.31,2582.68 5225,2570 5580,2570 5580,2658.8 5572.69,2666.12
  pour cut-out: 4987.55,3023.71 4991.26,3020 5125,3020 5125,3040 5105,3060 4975,3060
  pour cut-out: 4860,3495 5025.39,3495 5024.37,3496.02 5024.37,3529.37 4829.37,3529.37 4825,3525
  pour cut-out: 3373.02,3287.39 3378.05,3282.36 3378.05,3096.89 3341.89,3096.89 3365,3120 3365,3320 3355,3320 3346.89,3311.89
  pour cut-out: 3122.39,3096.98 3120,3099.37 3120,3185 3150,3185 3160,3175 3160,3080
  pour cut-out: 3187.61,3031.76 3202.39,3031.76 3210,3039.37 3210,3045 3185,3045
  pour cut-out: 3187.61,3233.24 3194.37,3240 3310,3240 3310,3264.09 3350,3224.09 3350,3220 3275,3220 3245,3190 3234.37,3200.63 3175,3200.63
  pour cut-out: 3376.37,3443.43 3376.37,3466.37 3380,3470 3395,3455 3405,3455
  pour cut-out: 3351.76,3557.39 3351.76,3533.24 3355,3530 3375,3550 3435,3550 3435,3565 3430,3570
  pour cut-out: 3462.98,3641.96 3393.04,3641.96 3402.72,3632.28 3402.72,3622.61 3467.61,3622.61 3470,3625
  pour cut-out: 3586.23,3597.06 3580,3603.28 3580,3610 3565,3610 3560,3605 3560,3590
  pour cut-out: 5289,3354 5301,3354 5301,3260 5270,3260
  pour cut-out: 5339,3260 5351,3260 5350,3261 5350,3275 5330,3275
  pour cut-out: 5289,3914 5301,3914 5301,3820 5289,3820
  pour cut-out: 5339,3820 5351,3820 5350,3821 5350,3840 5340,3840 5335,3845
  pour cut-out: 4808.19,3780 4810,3781.81 4810,3820 4790,3820 4790,3780
  pour cut-out: 4812.85,4015 4812.85,4115 4795,4115 4795,4045 4780,4030
  pour cut-out: 4875,4052.85 4975,4052.85 4975,4040 4960,4025 4885,4025
  pour cut-out: 3691.76,3177.39 3691.76,3167.61 3721.98,3167.61 3724.37,3170 3720,3174.37 3720,3180
  pour cut-out: 3526.54,3269.99 3526.54,3277.83 3516.98,3287.39 3516.98,3301.65 3518.62,3300 3545,3300 3545,3284.5 3542.87,3282.36
  pour cut-out: 3451.76,3287.39 3438.24,3287.39 3438.24,3298.24 3440,3300 3455,3300
  pour cut-out: 3838.2,3462.94 3838.2,3429.83 3847.98,3412.98 3853.35,3400 3845,3391.65 3830,3410 3805.08,3462.94
  pour cut-out: 4617.79,3222.99 4616.47,3232.3 4617.57,3255.2 4638.29,3255.2 4638.29,3261.22 4618.55,3259.07 4607.15,3255.2 4606.96,3241.81
  pour cut-out: 4638.29,3255.2 4638.29,3239.52 4616.81,3218.04 4600,3234.85 4600,3248.05 4607.15,3255.2
  pour cut-out: 4705.04,3363.18 4703.22,3365 4665,3365 4665,3371.53 4676.26,3382.79 4679.04,3380 4700,3380
Bottom Layer:
  rectangle net GND: 3855,3940 3970,4080
  rectangle net GND: 3865,2320 3955,2435
  pour cut-out: 3897.5,2315 3897.5,4275 3912.5,4275 3937.5,4275 3937.5,2320 3922.5,2320

## Silkscreen, mask and mechanical layers (free items; w line width, h text height)
Top Overlay:
  text "S  V  G" at 5975,2595 h40 r90
  text "V  S   G" at 4040,2355 h40 r90

## Text inside footprints (layer, text, board x,y; h text height)
C31: Top Overlay "+" at 3250,2862 h30 r270
CIN: Top Overlay "+" at 2935,3922 h30 r270
CIN21: Top Overlay "+" at 2930,3447 h30 r270
CIN31: Top Overlay "+" at 3548,2910 h30
COUT: Top Overlay "+" at 3413,3725 h30
UART: Top Overlay "8" at 4715,4035 h30 r180; Top Overlay "7" at 4715,4135 h30 r180; Top Overlay "1" at 5155,4135 h30 r180; Top Overlay "2" at 5175,4035 h30 r180